# Altium PCB SAMV71_Xplained_Ultra.PcbDoc (part 8 of 9)
Units mm, origin at the board's own origin, x right, y up, seen from the top; angles counter-clockwise.
Board outline 90 x 135 mm, 8 copper layers (Top Layer LF-Signals, Ground Plane 1 (GND), Power Plane (VCC), Ground Plane 2 (GND), Signal Layer 1, Signal Layer 2, Ground Plane 3 (GND), Bottom Layer LF-Signals), stack 1.632 mm thick; 483 components, 411 nets, 1994 pads, 1021 vias.
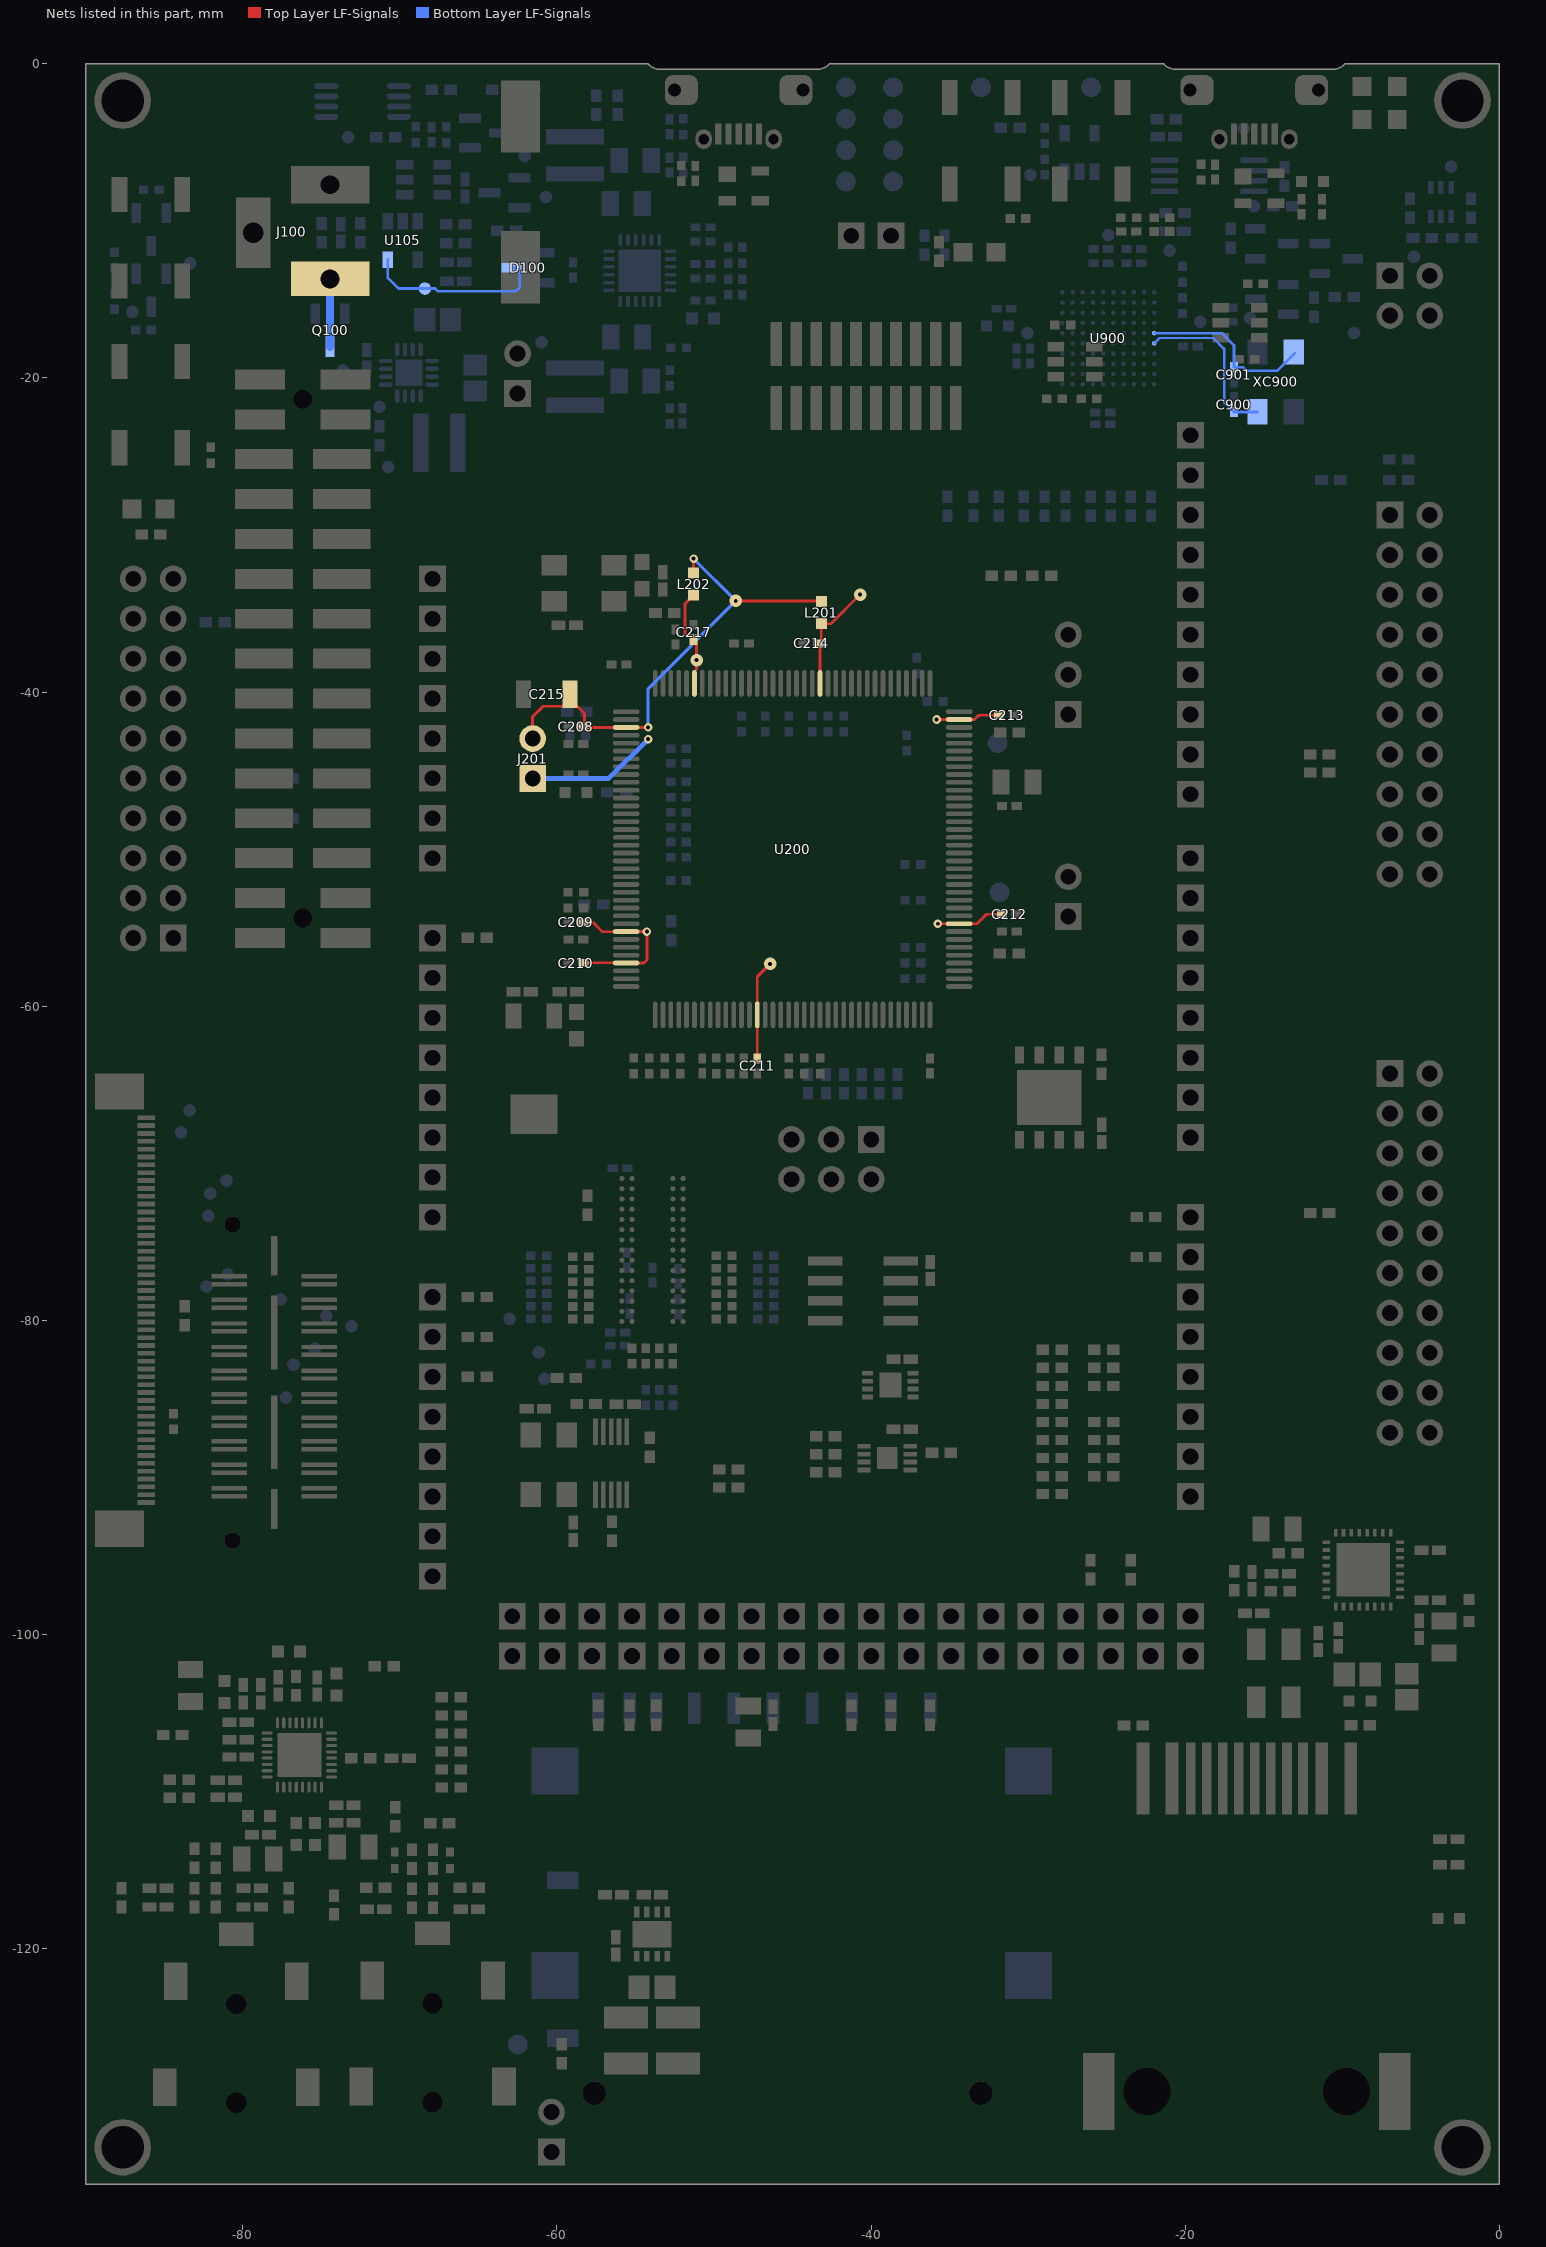
[diagram p13: the nets of this part, all layers, seen from the top]

## Via types
v1: diameter 0.55, hole 0.25, Top Layer LF-Signals to Bottom Layer LF-Signals, 546 vias
v2: diameter 0.55, hole 0.25, Top Layer LF-Signals to Bottom Layer LF-Signals, tented both sides, 190 vias
v3: diameter 0.55/0.55/0.55/0.8 (per signal layer), hole 0.25, Top Layer LF-Signals to Bottom Layer LF-Signals, tented top, 179 vias
v4: diameter 0.4, hole 0.2, Top Layer LF-Signals to Bottom Layer LF-Signals, 40 vias
v5: diameter 0.55, hole 0.25, Top Layer LF-Signals to Bottom Layer LF-Signals, tented top, 24 vias
v6: diameter 0.4, hole 0.2, Top Layer LF-Signals to Bottom Layer LF-Signals, tented both sides, 16 vias
v7: diameter 0.7, hole 0.35, Top Layer LF-Signals to Bottom Layer LF-Signals, 9 vias
v8: diameter 0.4/0.4/0.4/0.8 (per signal layer), hole 0.2, Top Layer LF-Signals to Bottom Layer LF-Signals, tented top, 6 vias
v9: diameter 0.4, hole 0.2, Top Layer LF-Signals to Bottom Layer LF-Signals, tented top, 5 vias
v10: diameter 0.66, hole 0.33, Top Layer LF-Signals to Bottom Layer LF-Signals, tented top, 4 vias
v11: diameter 0.55/0.55/0.55/0.8 (per signal layer), hole 0.25, Top Layer LF-Signals to Bottom Layer LF-Signals, 2 vias

## Nets (pads, with @x,y where several pads share a name; then routed paths per layer and width w, separated by ;. In a path a pad name is that pad's centre, name@x,y a point inside that pad or via, vN(x,y) a via of type N, cw(c..) or ccw(c..) an arc to the next point about the centre after c; other vN are vias at no path point) (continued)
VDDCORE: C209.1 C210.1 C211.1 C212.1 C213.1 J201.1@-61.55,-45.5 U200.29 U200.33 U200.50 U200.81 U200.107 | length 33.1
  Top Layer LF-Signals w0.175: U200.107@-34.4,-41.75 -33.425,-41.75 -33.15,-41.475 C213.1@-31.85,-41.475
  Top Layer LF-Signals w0.18: C210.1@-58.25,-57.25 -58.25,-57.238 -55.612,-57.238 U200.33@-55.6,-57.25 -54.475,-57.25 -54.275,-57.05 v1(-54.275,-55.25) U200.29@-55.6,-55.25 -55.6,-55.265 -57.107,-55.265 -57.137,-55.235 -57.14,-55.235 -57.725,-54.65 C209.1@-58.25,-54.65 ; C211.1@-47.25,-63.25 U200.50@-47.25,-60.55 -47.25,-58.125 v3(-46.425,-57.3) ; v1(-35.825,-41.75) U200.107@-34.4,-41.75 ; v1(-35.75,-54.75) -33.25,-54.75 -32.65,-54.15 C212.1@-31.75,-54.15
  Bottom Layer LF-Signals w0.3: J201.1@-61.55,-45.5 -56.7,-45.5 v1(-54.2,-43)
VDDOUT: C208.1 C215.1 J201.2@-61.55,-42.96 L201.1 L202.1 U200.3 | length 31.8
  Top Layer LF-Signals w0.175: C208.1@-58.25,-42.2 -58.187,-42.263 -55.6,-42.263 U200.3@-55.6,-42.25 v1(-54.2,-42.25)
  Top Layer LF-Signals w0.18: J201.2@-61.55,-42.96 -61.55,-41.575 -60.875,-40.9 -59.3,-40.9 -59.175,-40.775 C215.1@-59.175,-40.125 -59.175,-40.45 -58.25,-41.375 C208.1@-58.25,-42.2
  Top Layer LF-Signals w0.2: L202.1@-51.3,-32.426 v1(-51.3,-31.508) ; v3(-48.618,-34.197) -43.228,-34.197 L201.1@-43.175,-34.25
  Bottom Layer LF-Signals w0.2: v1(-54.2,-42.25) -54.2,-39.779 v3(-48.618,-34.197) v1@-51.306,-31.508
VDDPLL: C214.1 L201.2 U200.123 | length 7.1
  Top Layer LF-Signals w0.175: C214.1@-43.275,-36.9 -43.175,-36.8 L201.2@-43.175,-35.65 -42.55,-35.65 v3(-40.7,-33.8) ; U200.123@-43.25,-39.45 C214.1@-43.25,-36.9
VDDUTMIC: C217.1 L202.2 U200.139 | length 6.4
  Top Layer LF-Signals w0.175: L202.2@-51.3,-33.826 -51.853,-34.379 -51.853,-36.297 -51.75,-36.4 -51.465,-36.4 -51.3,-36.565 -51.3,-36.75 -51.111,-36.939 v3(-51.111,-37.966) -51.111,-38.563 -51.25,-38.702 U200.139@-51.25,-39.45
VIN: J100.3 Q100.3 | length 4.6
  Bottom Layer LF-Signals w0.5: Q100.3@-74.45,-18.025 J100.3@-74.45,-13.7 J100.3@-74.25,-13.5
VMAX: D100.3 pad.1@-68.411,-14.313 U105.5 | length 11.7
  Bottom Layer LF-Signals w0.175: U105.5@-70.771,-12.463 -70.771,-13.64 -70.098,-14.313 pad.1@-68.411,-14.313 -67.755,-14.313 -67.579,-14.489 -62.631,-14.489 -62.373,-14.231
  Bottom Layer LF-Signals w0.18: D100.3@-62.898,-12.981 -62.51,-12.981 -62.373,-13.118 -62.373,-14.231
XIN0: C900.1 U900.A5 XC900.1 | length 10.6
  Bottom Layer LF-Signals w0.15: U900.A5@-21.975,-17.8 -21.637,-17.462 -18.213,-17.462 -17.525,-18.15
  Bottom Layer LF-Signals w0.175: -17.525,-18.15 -17.525,-21.55 C900.1@-16.9,-22.175 XC900.1@-15.425,-22.175
XOUT0: C901.1 U900.A6 XC900.3 | length 11.2
  Bottom Layer LF-Signals w0.175: U900.A6@-21.975,-17.15 -17.675,-17.15 -16.9,-17.925 C901.1@-16.9,-19.325 -16.325,-19.325 -16.1,-19.55 -14.15,-19.55 XC900.3@-13.025,-18.425
pads on no net: D101.2 J101.1@-6.97,-13.49 J101.2@-4.43,-13.49 J101.3@-6.97,-16.03 J101.4@-4.43,-16.03 J103.1@-62.51,-20.987 J103.2@-62.51,-18.447 J200.1@-27.442,-54.295 J200.2@-27.442,-51.755 J201.1@-61.55,-45.5 J201.2@-61.55,-42.96 J202.1@-27.442,-41.43 J202.2@-27.442,-38.89 J202.3@-27.442,-36.35 J302.6@-44.834,-1.675 J302.7@-52.034,-1.675 J302.8@-46.209,-4.8 J302.9@-50.659,-4.8 J400.0 J400.1@-76.185,-21.364 J401.1@-6.97,-28.73 J401.2@-4.43,-28.73 J401.3@-6.97,-31.27 J401.4@-4.43,-31.27 J401.5@-6.97,-33.81 J401.6@-4.43,-33.81 J401.7@-6.97,-36.35 J401.8@-4.43,-36.35 J401.9@-6.97,-38.89 J401.10@-4.43,-38.89 J401.11@-6.97,-41.43 J401.12@-4.43,-41.43 J401.13@-6.97,-43.97 J401.14@-4.43,-43.97 J401.15@-6.97,-46.51 J401.16@-4.43,-46.51 J401.17@-6.97,-49.05 J401.18@-4.43,-49.05 J401.19@-6.97,-51.59 J401.20@-4.43,-51.59 J402.1@-6.97,-64.29 J402.2@-4.43,-64.29 J402.3@-6.97,-66.83 J402.4@-4.43,-66.83 J402.5@-6.97,-69.37 J402.6@-4.43,-69.37 J402.7@-6.97,-71.91 J402.8@-4.43,-71.91 J402.9@-6.97,-74.45 J402.10@-4.43,-74.45 J402.11@-6.97,-76.99 J402.12@-4.43,-76.99 J402.13@-6.97,-79.53 J402.14@-4.43,-79.53 J402.15@-6.97,-82.07 J402.16@-4.43,-82.07 J402.17@-6.97,-84.61 J402.18@-4.43,-84.61 J402.19@-6.97,-87.15 J402.20@-4.43,-87.15 J403.7 J403.8 J403.11 J403.13 J404.23 J404.24 J404.25 J404.26 J404.28 J404.29 J404.30 J404.31 J404.37 J404.38 J404.39 J404.40 J405.0 J405.1 J405.3 J405.4 J405.5 J405.7 J405.8 J405.9 J405.11 J405.12 J405.13 J405.14 J405.15 J405.17 J405.18 J405.19 J405.20 J405.21 J405.22 J405.23 J405.24 J405.26 J405.28 J405.29 J405.30 J405.31 J405.32 J405.36 J406.1@-84.44,-55.654 J406.2@-86.98,-55.654 J406.3 J406.4@-86.98,-53.114 J406.5 J406.6@-86.98,-50.574 J406.7@-84.44,-48.034 J406.8@-86.98,-48.034 J406.9@-84.44,-45.494 J406.10@-86.98,-45.494 J406.11 J406.12@-86.98,-42.954 J406.13@-84.44,-40.414 J406.14@-86.98,-40.414 J406.15@-84.44,-37.874 J406.16@-86.98,-37.874 J406.17 J406.18@-86.98,-35.334 J406.19 J406.20@-86.98,-32.794 J500.1@-19.67,-46.51 J500.2@-19.67,-43.97 J500.3@-19.67,-41.43 J500.4@-19.67,-38.89 J500.5@-19.67,-36.35 J500.6@-19.67,-33.81 J500.7@-19.67,-31.27 J500.8@-19.67,-28.73 J500.9@-19.67,-26.19 J500.10@-19.67,-23.65 J501.1@-67.93,-32.794 J501.2@-67.93,-35.334 J501.3@-67.93,-37.874 J501.4@-67.93,-40.414 J501.5@-67.93,-42.954 J501.6@-67.93,-45.494 J501.7@-67.93,-48.034 J501.8@-67.93,-50.574 J502.1@-67.93,-55.654 J502.2@-67.93,-58.194 J502.3@-67.93,-60.734 J502.4@-67.93,-63.274 J502.5@-67.93,-65.814 J502.6@-67.93,-68.354 J502.7@-67.93,-70.894 J502.8@-67.93,-73.434 J503.1@-19.67,-68.354 J503.2@-19.67,-65.814 J503.3@-19.67,-63.274 J503.4@-19.67,-60.734 J503.5@-19.67,-58.194 J503.6@-19.67,-55.654 J503.7@-19.67,-53.114 J503.8@-19.67,-50.574 J504.1@-67.93,-78.514 J504.2@-67.93,-81.054 J504.3@-67.93,-83.594 J504.4@-67.93,-86.134 J504.5@-67.93,-88.674 J504.6@-67.93,-91.214 J504.7@-67.93,-93.754 J504.8@-67.93,-96.294 J505.1@-19.67,-91.214 J505.2@-19.67,-88.674 J505.3@-19.67,-86.134 J505.4@-19.67,-83.594 J505.5@-19.67,-81.054 J505.6@-19.67,-78.514 J505.7@-19.67,-75.974 J505.8@-19.67,-73.434 J506.1@-39.99,-68.481 J506.2@-39.99,-71.021 J506.3@-42.53,-68.481 J506.4@-42.53,-71.021 J506.5@-45.07,-68.481 J506.6@-45.07,-71.021 J507.0 J600.0 J700.0 J700.9 J800.0 J800.4 J800.5 J801.0 J801.4 J801.5 J900.4 J900.6@-12,-1.675 J900.7@-19.2,-1.675 J900.8@-13.375,-4.8 J900.9@-17.825,-4.8 J1000.1@-60.35,-132.945 J1000.2@-60.35,-130.405 U100.5 U101.5 U101.6 U101.7 U104.0 U106.3 U600.0 U600.9 U601.G2 U601.G6 U601.H1 U601.H2 U601.H7 U601.J1 U601.K1 U601.L2 U601.L6 U601.M6 U601.M7 U602.1 U602.2 U602.3 U602.7 U603.1 U603.2 U603.3 U603.7 U800.24 U800.26 U801.4 U900.A2 U900.A4 U900.A7 U900.B1 U900.B3 U900.B7 U900.C1 U900.C2 U900.C4 U900.C6 U900.D1 U900.D2 U900.D4 U900.D5 U900.D7 U900.E1 U900.E3 U900.E4 U900.E7 U900.E8 U900.F3 U900.F4 U900.G1 U900.G2 U900.G3 U900.G4 U900.G6 U900.G8 U900.G9 U900.G10 U900.H1 U900.H4 U900.H5 U900.H6 U900.H10 U900.J1 U900.J2 U900.J3 U900.J7 U900.J10 U900.K1 U900.K5 U900.K7

## Polygon pours and split planes (outlines as drawn)
GND on Top Layer LF-Signals "Top Layer GND Fill" (solid, remove dead copper, pour order 26): 0,0 -90,0 -90,-135 0,-135
RJ45_GND on Top Layer LF-Signals "Ethernet GND" (solid, pour order 17): -27.075,-106.425 -3.35,-106.425 -3.35,-134.375 -27.075,-134.375
AUDIO_GND on Top Layer LF-Signals "Audio GND" (solid, remove dead copper, pour order 16): -90,-98.175 -62.2,-98.175 -62.2,-134.925 -62.225,-134.95 -89.95,-134.95 -90,-135
GND on Bottom Layer LF-Signals "Bottom Layer GND Fill" (solid, remove dead copper, pour order 32): 0,0 -90,0 -90,-135 0,-135
VCC_P3V3 on Bottom Layer LF-Signals "VCC_Fill" (solid, remove dead copper, pour order 14): -58.307,-4.63 -58.307,-2.805 -58.207,-2.705 -55.407,-2.705 -55.357,-2.755 -55.357,-4.555 -55.432,-4.63
PAD on Bottom Layer LF-Signals "Top Layer LF-signals-No Net" (solid, remove dead copper, pour order 13): -30.7,-64.05 -26.6,-64.05 -26.6,-67.55 -30.7,-67.55
GND on Bottom Layer LF-Signals "REG 5V0 GND" (solid, pour order 18): -67.4,-14.925 -64.05,-14.925 -64.05,-19.825 -66.1,-19.825 -66.1,-20.75 -68.425,-20.75 -68.425,-19.675 -67.4,-19.675 -67.4,-17.425
NetL100_1 on Bottom Layer LF-Signals "REF 5V0 SW" (solid, pour order 19): -69.925,-21.658 -69.925,-26.35 -67.775,-26.35 -67.775,-21.658
VCC_IN_P5V0 on Bottom Layer LF-Signals "REF 5V0 OUT" (solid, pour order 22): -64.05,-20.125 -64.05,-26.35 -67.375,-26.35 -67.375,-21.65 -66.7,-20.975 -66.15,-20.975 -65.95,-20.975 -65.95,-20.125
VCC_EXT_P5V0_P14V0 on Bottom Layer LF-Signals "REG 5V0 IN" (solid, pour order 24): -68.43,-17.675 -68.429,-17.675 -67.65,-17.675 -67.65,-14.925 -73.825,-14.925 -73.825,-17.675
no net on Top Overlay "MountingHole_Index" (solid): -4.5,-0.3 -0.3,-0.3 -0.3,-4.5 -4.5,-4.5
GND on Ground Plane 1 (GND) (split plane): -67.577,-21.573 -71.323,-21.573 -71.323,-17.627 -67.577,-17.627
GND on Ground Plane 1 (GND) (split plane): -0.51,-134.49 -89.49,-134.49 -89.49,-0.51 -54.412,-0.51 -54.398,-0.523 -54.256,-0.623 -54.105,-0.707 -53.944,-0.774 -53.778,-0.822 -53.607,-0.851 -53.434,-0.86 -43.434,-0.86 -43.261,-0.851 -43.09,-0.822 -42.924,-0.774 -42.763,-0.707 -42.612,-0.623 -42.47,-0.523 -42.456,-0.51 -21.578,-0.51 -21.564,-0.523 -21.422,-0.623 -21.271,-0.707 -21.11,-0.774 -20.944,-0.822 -20.773,-0.851 -20.6,-0.86 -10.6,-0.86 -10.427,-0.851 -10.256,-0.822 -10.09,-0.774 -9.929,-0.707 -9.778,-0.623 -9.636,-0.523 -9.622,-0.51 -0.51,-0.51
VCC_EDBG_P3V3 on Power Plane (VCC) (split plane): -0.51,-14.57 -0.709,-14.371 -0.741,-14.347 -0.777,-14.332 -0.816,-14.327 -5.842,-14.327 -5.881,-14.332 -5.918,-14.347 -5.949,-14.371 -5.973,-14.402 -5.988,-14.439 -5.993,-14.478 -5.993,-16.958 -5.988,-16.997 -5.973,-17.034 -5.949,-17.065 -4.651,-18.363 -4.651,-27.349 -33.937,-27.349 -35.599,-25.687 -35.599,-8.35 -35.604,-8.311 -35.619,-8.274 -35.643,-8.243 -38.024,-5.862 -38.055,-5.838 -38.07,-5.832 -38.092,-5.823 -38.131,-5.818 -56.686,-5.818 -56.686,-0.51 -54.412,-0.51 -54.398,-0.523 -54.256,-0.623 -54.105,-0.707 -53.944,-0.774 -53.778,-0.822 -53.607,-0.851 -53.434,-0.86 -43.434,-0.86 -43.261,-0.851 -43.09,-0.822 -42.924,-0.774 -42.763,-0.707 -42.612,-0.623 -42.47,-0.523 -42.456,-0.51 -21.578,-0.51 -21.564,-0.523 -21.422,-0.623 -21.271,-0.707 -21.11,-0.774 -20.944,-0.822 -20.773,-0.851 -20.6,-0.86 -10.6,-0.86 -10.427,-0.851 -10.256,-0.822 -10.09,-0.774 -9.929,-0.707 -9.778,-0.623 -9.636,-0.523 -9.622,-0.51 -0.51,-0.51
VDDCORE on Power Plane (VCC) (split plane): -35.151,-59.849 -54.849,-59.849 -54.849,-40.151 -35.151,-40.151
VCC_MCU_P3V3 on Power Plane (VCC) (split plane): -37.451,-10.213 -37.451,-29.6 -37.446,-29.639 -37.437,-29.661 -37.431,-29.676 -37.407,-29.707 -36.357,-30.757 -30.926,-36.188 -30.926,-60.925 -35.025,-65.024 -53.812,-65.024 -61.849,-56.987 -61.849,-40.738 -45.143,-24.032 -45.119,-24.001 -45.115,-23.99 -45.104,-23.964 -45.099,-23.925 -45.099,-10.613 -42.862,-8.376 -39.288,-8.376
VCC_P5V0 on Power Plane (VCC) (split plane): -51.676,-15.787 -58.563,-22.674 -62.837,-22.674 -64.238,-21.273 -64.238,-9.334 -61.03,-6.126 -56.837,-6.126 -56.798,-6.121 -56.796,-6.12 -51.676,-6.12
VCC_TARGET_P3V3 on Power Plane (VCC) (split plane): -56.989,-5.818 -58.42,-5.818 -58.459,-5.823 -58.461,-5.824 -61.093,-5.824 -61.132,-5.829 -61.169,-5.844 -61.2,-5.868 -64.496,-9.164 -64.52,-9.195 -64.535,-9.232 -64.54,-9.271 -64.54,-21.336 -64.535,-21.375 -64.52,-21.412 -64.496,-21.443 -63.007,-22.932 -62.976,-22.956 -62.939,-22.971 -62.9,-22.976 -58.5,-22.976 -58.461,-22.971 -58.424,-22.956 -58.393,-22.932 -51.418,-15.957 -51.394,-15.926 -51.379,-15.889 -51.374,-15.85 -51.374,-6.12 -38.194,-6.12 -35.901,-8.413 -35.901,-25.75 -35.896,-25.789 -35.887,-25.811 -35.881,-25.826 -35.857,-25.857 -34.107,-27.607 -34.076,-27.631 -34.039,-27.646 -34,-27.651 -4.5,-27.651 -4.461,-27.646 -4.424,-27.631 -4.393,-27.607 -4.369,-27.576 -4.354,-27.539 -4.349,-27.5 -4.349,-18.3 -4.354,-18.261 -4.369,-18.224 -4.393,-18.193 -5.691,-16.895 -5.691,-14.629 -0.879,-14.629 -0.51,-14.998 -0.51,-134.49 -89.49,-134.49 -89.49,-0.51 -56.989,-0.51
VCC_P1V2 on Ground Plane 2 (GND) (split plane): -38.376,-20.563 -38.376,-53.975 -38.371,-54.014 -38.362,-54.036 -38.356,-54.051 -38.332,-54.082 -2.076,-90.338 -2.076,-101.562 -4.413,-103.899 -14.262,-103.899 -16.149,-102.012 -16.149,-85.375 -16.154,-85.336 -16.169,-85.299 -16.193,-85.268 -53.199,-48.262 -53.199,-46.007 -53.194,-46.001 -53.179,-45.964 -53.174,-45.925 -53.174,-13.326 -45.613,-13.326
VCC_EXT_P5V0_P14V0 on Ground Plane 2 (GND) (split plane): -71.226,-18.25 -71.226,-19.837 -79.007,-27.618 -79.031,-27.649 -79.046,-27.686 -79.051,-27.725 -79.051,-78.674 -83.737,-78.674 -84.199,-78.212 -84.199,-74.863 -83.337,-74.001 -83.313,-73.97 -83.298,-73.933 -83.293,-73.894 -83.293,-19.026 -75.4,-19.026 -75.361,-19.021 -75.324,-19.006 -75.293,-18.982 -75.282,-18.968 -75.268,-18.957 -72.737,-16.426 -71.226,-16.426
VCC_P5V0 on Ground Plane 2 (GND) (split plane): -53.501,-48.325 -53.496,-48.364 -53.487,-48.386 -53.481,-48.401 -53.457,-48.432 -16.451,-85.438 -16.451,-102.012 -18.188,-103.749 -36.25,-103.749 -36.289,-103.754 -36.326,-103.769 -36.357,-103.793 -49.763,-117.199 -66.162,-117.199 -69.774,-113.587 -69.774,-56.65 -69.774,-23.088 -60.012,-13.326 -53.501,-13.326
VCC_P5V0 on Ground Plane 2 (GND) (split plane): -5.515,-15.117 -5.515,-16.975 -6.039,-17.499 -11.987,-17.499 -21.193,-8.293 -21.224,-8.269 -21.239,-8.263 -21.261,-8.254 -21.3,-8.249 -43.219,-8.249 -43.259,-8.254 -43.284,-8.265 -43.295,-8.269 -43.326,-8.293 -45.614,-10.581 -67.257,-10.581 -67.296,-10.586 -67.333,-10.601 -67.364,-10.625 -71.12,-14.381 -71.151,-14.394 -71.182,-14.418 -71.206,-14.449 -71.221,-14.486 -71.226,-14.525 -71.226,-16.124 -72.8,-16.124 -72.839,-16.129 -72.876,-16.144 -72.907,-16.168 -75.463,-18.724 -85.173,-18.724 -85.674,-18.223 -85.674,-16.163 -84.987,-15.476 -78.725,-15.476 -78.686,-15.471 -78.664,-15.462 -78.649,-15.456 -78.618,-15.432 -66.887,-3.701 -16.93,-3.701
VCC_P1V8 on Ground Plane 2 (GND) (split plane): -45.726,-11.675 -45.726,-13.024 -53.325,-13.024 -53.338,-13.025 -53.35,-13.024 -60.075,-13.024 -60.114,-13.029 -60.151,-13.044 -60.182,-13.068 -70.032,-22.918 -70.056,-22.949 -70.071,-22.986 -70.076,-23.025 -70.076,-56.65 -70.076,-62.275 -70.076,-113.587 -73.513,-117.024 -81.437,-117.024 -84.349,-114.112 -84.349,-100.638 -78.793,-95.082 -78.769,-95.051 -78.754,-95.014 -78.749,-94.975 -78.749,-27.788 -70.968,-20.007 -70.944,-19.976 -70.929,-19.939 -70.924,-19.9 -70.924,-14.613 -67.194,-10.883 -45.726,-10.883
GND on Ground Plane 2 (GND) (split plane): -0.51,-134.49 -89.49,-134.49 -89.49,-0.51 -54.412,-0.51 -54.398,-0.523 -54.256,-0.623 -54.105,-0.707 -53.944,-0.774 -53.778,-0.822 -53.607,-0.851 -53.434,-0.86 -43.434,-0.86 -43.261,-0.851 -43.09,-0.822 -42.924,-0.774 -42.763,-0.707 -42.612,-0.623 -42.47,-0.523 -42.456,-0.51 -21.578,-0.51 -21.564,-0.523 -21.422,-0.623 -21.271,-0.707 -21.11,-0.774 -20.944,-0.822 -20.773,-0.851 -20.6,-0.86 -10.6,-0.86 -10.427,-0.851 -10.256,-0.822 -10.09,-0.774 -9.929,-0.707 -9.778,-0.623 -9.636,-0.523 -9.622,-0.51 -0.51,-0.51
GND on Ground Plane 3 (GND) (split plane): -67.577,-21.573 -71.323,-21.573 -71.323,-17.627 -67.577,-17.627
GND on Ground Plane 3 (GND) (split plane): -0.51,-134.49 -89.49,-134.49 -89.49,-0.51 -54.412,-0.51 -54.398,-0.523 -54.256,-0.623 -54.105,-0.707 -53.944,-0.774 -53.778,-0.822 -53.607,-0.851 -53.434,-0.86 -43.434,-0.86 -43.261,-0.851 -43.09,-0.822 -42.924,-0.774 -42.763,-0.707 -42.612,-0.623 -42.47,-0.523 -42.456,-0.51 -21.578,-0.51 -21.564,-0.523 -21.422,-0.623 -21.271,-0.707 -21.11,-0.774 -20.944,-0.822 -20.773,-0.851 -20.6,-0.86 -10.6,-0.86 -10.427,-0.851 -10.256,-0.822 -10.09,-0.774 -9.929,-0.707 -9.778,-0.623 -9.636,-0.523 -9.622,-0.51 -0.51,-0.51

## Keep-outs
Keep-Out Layer:
  lines w0.1: -59.7,-0.3 -54.209,-0.3 ; -43.434,-0.649 ccw(c-43.434,0.386) -42.658,-0.3 ; -20.599,-0.649 cw(c-20.599,0.386) -21.375,-0.3 ; -10.6,-0.649 ccw(c-10.6,0.386) -9.824,-0.3 ; -54.209,-0.3 ccw(c-53.433,0.386) -53.433,-0.649 cw(c-53.433,0.386) -54.209,-0.3 ; -42.658,-0.3 -54.259,-0.3 -89.7,-0.3 -89.7,-134.7 -0.3,-134.7 -0.3,-0.3 -9.825,-0.3 ; -42.658,-0.3 -21.375,-0.3 ; -21.375,-0.3 -9.824,-0.3

## Other copper
Top Layer LF-Signals:
  pour cut-out: -3.575,-117.73 -2.871,-117.73 -2.871,-118.423 -3.575,-118.423
  pour cut-out: -55.872,-70.425 -51.972,-70.425 -51.972,-80.625 -55.872,-80.625
  pour cut-out: -71.667,-22.128 -71.667,-14.796 -72.4,-14.796 -72.4,-22.116
  pour cut-out: -71.87,-14.796 -71.87,-14.8 -70.8,-14.8 -70.8,-14.275 -71.944,-14.275
  pour cut-out: -71.87,-22.1 -63.8,-22.1 -63.8,-22.634 -71.87,-22.634
Bottom Layer LF-Signals:
  rectangle net NetL100_1: -69.925,-21.9 -68.418,-21.658
  rectangle net VCC_EXT_P5V0_P14V0: -69.92,-17.675 -68.43,-17.473
  region net GND: -67.305,-20.75 -67.305,-19.921 -67.617,-19.921 -67.617,-20.75
  pour cut-out: -64.05,-25.981 -63.849,-25.981 -63.849,-14.615 -64.05,-14.615
  pour cut-out: -72.625,-17.675 -72.625,-20.292 -72.617,-20.3 -70.9,-20.3 -70.9,-20.55 -70.908,-20.558 -72.95,-20.558 -72.95,-17.67
  region net VCC_P5V0: -53.582,-14.805 -53.582,-15.48 -53.432,-15.63 -52.982,-15.63 -52.032,-16.58 -51.007,-16.58 -50.857,-16.43 -50.857,-14.78 -50.907,-14.73 -52.057,-14.73 -52.457,-14.33 -53.107,-14.33 -53.107,-14.63 -53.282,-14.805
  region net GND: -55.107,-11.58 -54.857,-11.58 -54.857,-10.605 -53.307,-9.055 -53.307,-3.955 -55.107,-3.955
  region net NetL102_1: -55.382,-11.58 -55.382,-7.48 -55.457,-7.405 -56.582,-7.405 -56.882,-7.105 -56.882,-6.33 -57.232,-5.98 -60.607,-5.98 -60.932,-6.305 -60.932,-7.63 -60.732,-7.83 -56.007,-7.83 -55.782,-8.055 -55.782,-10.58 -55.582,-10.78 -55.582,-11.58
  region net VCC_P3V3: -55.457,-7.155 -55.357,-7.055 -55.357,-4.005 -55.432,-3.93 -61.132,-3.93 -61.332,-4.13 -61.332,-5.38 -60.982,-5.73 -57.132,-5.73 -56.667,-6.195 -56.667,-6.945 -56.457,-7.155
  region net VCC_P5V0: -55.882,-11.555 -55.882,-10.805 -56.007,-10.68 -56.007,-8.155 -56.082,-8.08 -59.932,-8.08 -60.107,-8.255 -60.107,-9.655 -58.307,-11.455 -57.357,-11.455 -57.257,-11.555
  region net VCC_P5V0: -55.882,-14.93 -55.882,-15.48 -56.007,-15.605 -56.007,-18.205 -56.082,-18.28 -59.932,-18.28 -60.107,-18.105 -60.107,-16.705 -58.332,-14.93
  region net VCC_P2V0: -55.457,-19.205 -55.357,-19.305 -55.357,-22.355 -55.432,-22.43 -61.132,-22.43 -61.332,-22.23 -61.332,-20.98 -60.982,-20.63 -57.132,-20.63 -56.667,-20.165 -56.667,-19.415 -56.457,-19.205
  region net NetL101_1: -55.382,-14.78 -55.382,-18.88 -55.457,-18.955 -56.582,-18.955 -56.882,-19.255 -56.882,-20.03 -57.232,-20.38 -61.007,-20.38 -61.457,-19.93 -61.457,-18.93 -61.057,-18.53 -56.007,-18.53 -55.807,-18.33 -55.807,-15.755 -55.582,-15.53 -55.582,-14.78
  region net GND: -55.107,-14.78 -54.857,-14.78 -54.857,-15.805 -53.382,-17.28 -53.382,-22.405 -55.107,-22.405
  region net VCC_P5V0: -53.107,-12.03 -52.432,-12.03 -52.007,-11.605 -50.857,-11.605 -50.857,-10.055 -52.182,-10.055 -53.107,-10.98
  region net GND: -50.607,-16.83 -48.657,-16.83 -47.857,-16.03 -47.857,-15.355 -47.907,-15.305 -49.532,-15.305 -49.707,-15.13 -49.707,-14.13 -49.632,-14.055 -48.807,-14.055 -48.757,-14.005 -48.757,-12.33 -48.782,-12.305 -49.607,-12.305 -49.707,-12.205 -49.707,-11.055 -49.632,-10.98 -47.907,-10.98 -47.857,-10.93 -47.857,-10.105 -48.207,-9.755 -50.607,-9.755
Ground Plane 1 (GND) (plane layer: these items are gaps in the copper):
  lines w0.5: -71.575,-21.825 -67.325,-21.825 -67.325,-17.375 -71.575,-17.375 -71.575,-21.825
Power Plane (VCC) (plane layer: these items are gaps in the copper):
  lines w0.3: -58.42,-5.969 -38.131,-5.969 -35.75,-8.35 -35.75,-25.75 -34,-27.5 -4.5,-27.5 -4.5,-18.3 -5.842,-16.958 -5.842,-14.478 -0.816,-14.478 -0.252,-15.042 ; -57.658,0 -56.837,0 -56.837,-5.975 -61.093,-5.975 -64.389,-9.271 -64.389,-21.336 -62.9,-22.825 -58.5,-22.825 -51.525,-15.85 -51.525,-5.969 -45.339,-5.969 ; -62,-57.05 -62,-40.675 -45.25,-23.925 -45.25,-10.55 -42.925,-8.225 -39.225,-8.225 -37.3,-10.15 -37.3,-29.6 -36.25,-30.65 -30.775,-36.125 -30.775,-60.988 -34.962,-65.175 -53.875,-65.175 -62,-57.05 ; -55,-60 -35,-60 -35,-40 -55,-40 -55,-60
Ground Plane 2 (GND) (plane layer: these items are gaps in the copper):
  lines w0.3: -83.444,-18.875 -83.444,-73.894 -84.35,-74.8 -84.35,-78.275 -83.8,-78.825 -78.95,-78.825 ; -75.4,-18.875 -85.236,-18.875 -85.825,-18.286 -85.825,-16.1 -85.05,-15.325 -78.725,-15.325 -66.95,-3.55 -57.575,-3.55 -16.868,-3.55 -5.364,-15.054 -5.364,-17.038 -5.976,-17.65 -12.05,-17.65 -21.3,-8.4 -43.219,-8.4 -45.575,-10.756 -45.575,-11.675 ; -75.375,-18.85 -72.8,-16.275 -71.075,-16.275 ; -71.075,-18.25 -71.075,-19.9 ; -69.925,-62.275 -69.925,-23.025 -60.075,-13.175 -53.35,-13.175 -53.35,-48.325 -16.3,-85.375 -16.3,-102.075 ; -69.925,-56.65 -69.925,-113.65 ; -53.325,-45.925 -53.325,-13.175 -45.575,-13.175 ; -71.075,-19.9 -78.9,-27.725 -78.9,-94.975 -84.5,-100.575 -84.5,-114.175 -81.5,-117.175 -73.45,-117.175 -69.925,-113.65 ; -71.075,-19.9 -71.075,-14.525 -71.05,-14.525 -67.257,-10.732 -45.575,-10.732 -45.575,-13.15 -38.225,-20.5 -38.225,-53.975 -1.925,-90.275 -1.925,-101.625 -4.35,-104.05 -14.325,-104.05 -16.3,-102.075 ; -69.925,-113.65 -66.225,-117.35 -49.7,-117.35 -36.25,-103.9 -18.125,-103.9 -16.3,-102.075
Ground Plane 3 (GND) (plane layer: these items are gaps in the copper):
  lines w0.5: -71.575,-21.825 -67.325,-21.825 -67.325,-17.375 -71.575,-17.375 -71.575,-21.825

## Silkscreen, mask and mechanical layers (free items; w line width, h text height)
Top Overlay:
  circle w0.254: c-83.571,-2.35 r0.15
  pour cut-out: -4.26,-2.34 ccw(c-2.34,-2.34) -2.34,-4.26 ccw(c-2.34,-2.36) -0.44,-2.36 ccw(c-2.36,-2.36) -2.36,-0.44 ccw(c-2.36,-2.34)
  lines w0.254: -83.971,-4.5 -83.171,-4.5 ; -83.571,-4.5 -83.571,-3.9 ; -83.571,-2.35 -82.071,-2.35 ; -82.51,-3.411 cw(c-83.571,-2.35) -82.51,-1.289 ; -81.571,-2.35 -80.771,-2.35 ; -81.171,-2.75 -81.171,-1.95
  text "GND" at -89.05,-5.75 h1.52
  text "GND" at -85.014,-5.75 h1.52
  text "GND" at -3.75,-5.75 h1.52
  text "VCC_TARGET" at -38.3,-6.775 h1 r90
  text "VCC_MCU" at -40.925,-6.8 h1 r90
  text "DEBUG USB" at -21.4,-8.1 h1.5 r90
  text "TARGET USB" at -54.35,-9.2 h1.5 r90
  text "POWER" at -8.25,-10 h1.5 r90
  text "STATUS" at -6,-10.25 h1.5 r90
  text "SW0" at -36.2,-10.4 h1.5
  text "RESET" at -29.2,-10.4 h1.5
  text "EXT" at -7.866,-11.951 h0.67
  text "GND" at -5.326,-11.951 h0.67
  text "MCU CURRENT MEASURE" at -42.925,-12.15 h1 r90
  text "1" at -9.063,-13.913 h1.5
  text "LED0" at -34.525,-14.1 h1.5
  text "CORESIGHT20" at -44.601,-14.767 h1.5
  text "POWER" at -14.125,-15.225 h1.5
  text "PWR SWITCH" at -81.3,-15.263 h1.5 r90
  text "VIN - 5 to 14V" at -79.135,-16.375 h1.5
  text "3" at -9.063,-16.453 h1.5
  text "SUPER CAP" at -66.058,-16.7 h1.5
  text "CAMERA INTERFACE" at -80.925,-18.136 h1.5
  text "3V3" at -5.326,-18.264 h0.67
  text "5V0" at -7.866,-18.292 h0.67
  text "VBAT" at -60.412,-18.911 h1.5
  text "VCAP" at -60.412,-21.451 h1.5
  text "27" at -70.932,-23.093 h1.5
  text "SW1" at -81.425,-23.425 h1.5 r90
  text "SCL" at -17.8,-24.114 h1.5
  text "SWD + ETM" at -43.475,-25.938 h1.5
  text "EXT1" at -7.7,-26.1 h1.5
  text "SDA" at -17.8,-26.653 h1.5
  text "b" at -67.871,-27.67 h12
  text "AREF" at -17.801,-29.193 h1.5
  text "1" at -8.73,-29.238 h1.5
  text "12 MHz" at -61.226,-29.372 h1.5
  text "LED1" at -82.5,-29.875 h1.5 r90
  text "CRYSTAL" at -61.228,-30.614 h1.5
  text "21" at -70.932,-30.712 h1.5
  text "SAMV71" at -49.783,-30.836 h2
  text "X" at -41.43,-30.857 h4
  text "PLAINED" at -38.005,-30.857 h2
  text "ULTRA" at -29.082,-30.845 h1
  text "GND" at -17.801,-31.732 h1.5
  text "3" at -8.923,-31.778 h1.5
  text "VBAT" at -66.075,-33.258 h1.5
  text "D13" at -17.801,-34.271 h1.5
  text "5" at -8.925,-34.318 h1.5
  text "USB VBUS" at -30.751,-34.395 h1.5
  text "IOREF" at -66.075,-35.798 h1.5
  text "VBUS" at -25.476,-36.749 h1.5
  text "D12" at -17.801,-36.811 h1.5
  text "7" at -8.916,-36.858 h1.5
  text "SAMV71Q21" at -40,-36.95 h1.5
  text "RESET" at -66.075,-38.338 h1.5
  text "PC09" at -25.476,-39.289 h1.5
  text "D11" at -17.801,-39.35 h1.5
  text "9" at -8.936,-39.349 h1.5
  text "3V3" at -66.075,-40.878 h1.5
  text "LED1" at -25.476,-41.829 h1.5
  text "D10" at -17.801,-41.89 h1.5
  text "11" at -9.5,-41.889 h1.5
  text "11" at -70.932,-43.412 h1.5
  text "5V0" at -66.074,-43.418 h1.5
  text "D9" at -17.801,-44.43 h1.5
  text "13" at -9.673,-44.429 h1.5
  text "GND" at -66.075,-45.964 h1.5
  text "D8" at -17.801,-46.97 h1.5
  text "15" at -9.683,-46.969 h1.5
  text "J201" at -62.617,-48.338 h1.5
  text "GND" at -66.075,-48.498 h1.5
  text "17" at -9.7,-49.509 h1.5
  text "ERASE" at -29.725,-49.8 h1.5
  text "D7" at -17.801,-51.03 h1.5
  text "VIN" at -66.075,-51.038 h1.5
  text "SAMV71 DEBUG (SWD)" at -81.614,-51.489 h1.5 r90
  text "19" at -9.665,-52.049 h1.5
  text "PB12" at -25.476,-52.155 h1.5
  text "D6" at -17.801,-53.589 h1.5
  text "3V3" at -25.501,-54.83 h1.5
  text "1" at -70.932,-56.113 h1.5
  text "D5" at -17.801,-56.148 h1.5
  text "2" at -87.304,-58.289 h1.5
  text "1" at -84.667,-58.281 h1.5
  text "AD1" at -72.225,-58.658 h1.5
  text "D4" at -17.801,-58.708 h1.5
  text "AD2" at -72.406,-61.198 h1.5
  text "D3" at -17.801,-61.267 h1.5
  text "EXT2" at -6.978,-61.75 h1.5
  text "EXT4" at -89.081,-62.025 h1.5
  text "LCD" at -88.8,-63.4 h1.5
  text "AD3" at -72.397,-63.738 h1.5
  text "D2" at -17.801,-63.843 h1.5
  text "1" at -8.73,-64.749 h1.5
  text "32.768 kHz" at -59.153,-66.07 h1.5
  text "D1 (TXD)" at -17.801,-66.13 h1.5
  text "AD4" at -72.432,-66.278 h1.5
  text "RST" at -47.23,-66.85 h1.5
  text "SCK" at -43.911,-66.85 h1.5
  text "MISO" at -40.425,-66.85 h1.5
  text "3" at -8.923,-67.288 h1.5
  text "CRYSTAL" at -59.153,-67.312 h1.5
  text "D0 (RXD)" at -17.801,-68.69 h1.5
  text "AD5" at -72.407,-68.818 h1.5
  text "SDRAM" at -56.238,-69.75 h1.5
  text "5" at -8.925,-69.822 h1.5
  text "SPI" at -38.1,-70.225 h1.5
  text "QSPI FLASH" at -31.3,-70.675 h1.5
  text "AD6" at -72.409,-71.358 h1.5
  text "S25FL" at -31.3,-71.85 h1.5
  text "MEDIALB" at -80.901,-72.125 h1.5
  text "7" at -8.916,-72.361 h1.5
  text "GND" at -47.575,-73.55 h1.5
  text "MOSI" at -44.174,-73.55 h1.5
  text "5V0" at -40.424,-73.55 h1.5
  text "AD7" at -72.425,-73.898 h1.5
  text "D14" at -17.801,-73.896 h1.5
  text "9" at -8.936,-74.909 h1.5
  text "D15" at -17.801,-76.435 h1.5
  text "11" at -9.5,-77.449 h1.5
  text "AD8" at -72.4,-78.978 h1.5
  text "D16" at -17.801,-78.975 h1.5
  text "13" at -9.673,-79.989 h1.5
  text "AD9" at -72.39,-81.518 h1.5
  text "D17" at -17.801,-81.514 h1.5
  text "15" at -9.683,-82.529 h1.5
  text "AD10" at -73.165,-84.058 h1.5
  text "D18" at -17.801,-84.054 h1.5
  text "17" at -9.7,-85.069 h1.5
  text "AD11" at -72.995,-86.598 h1.5
  text "D19" at -17.801,-86.594 h1.5
  text "CRYPTO FOOTPRINT" at -34.05,-86.946 h1.5 r90
  text "19" at -9.665,-87.609 h1.5
  text "DAC0" at -73.287,-89.138 h1.5
  text "D20" at -17.801,-89.134 h1.5
  text "DAC1" at -73.117,-91.678 h1.5
  text "D21" at -17.801,-91.673 h1.5
  text "AT24MAC402" at -43.7,-91.95 h1.5
  text "KSZ8061RNB" at -11.69,-92.459 h1.5
  text "ETHERNET CONFIG" at -30.377,-92.683 h1.5 r90
  text "CS2100" at -54.95,-93.475 h1.5
  text "CAN" at -72.6,-93.65 h1.5
  text "RX" at -72.041,-94.775 h1.5
  text "CAN" at -72.6,-96.225 h1.5
  text "D52" at -59.85,-97.025 h1.5 r90
  text "D46" at -52.228,-97.025 h1.5 r90
  text "D44" at -49.688,-97.025 h1.5 r90
  text "D40" at -44.775,-97.025 h1.5 r90
  text "D26" at -26.823,-97.025 h1.5 r90
  text "D24" at -24.3,-97.025 h1.5 r90
  text "D22" at -21.751,-97.025 h1.5 r90
  text "5V0" at -19.206,-97.024 h1.5 r90
  text "TX" at -72.04,-97.35 h1.5
  text "D53" at -59.85,-105.5 h1.5 r90
  text "D47" at -51.6,-105.5 h1.5 r90
  text "D45" at -49.688,-105.5 h1.5 r90
  text "D39" at -42.1,-105.5 h1.5 r90
  text "D27" at -26.823,-105.5 h1.5 r90
  text "D23" at -20.95,-105.5 h1.5 r90
  text "WM8904" at -73.8,-105.7 h1.5
  text "ATA6561" at -57.35,-115.425 h1.52
  text "HEADPHONE" at -86.475,-128.475 h1.52 r90
  text "MICROPHONE" at -61.275,-128.65 h1.52 r90
  text "GND" at -89.1,-130.6 h1.52
  text "GND" at -3.8,-130.6 h1.52
  text "CAN_L" at -58.375,-131.546 h1.5
  text "CAN_H" at -58.375,-133.336 h1.5
Bottom Overlay:
  lines w0.1: -16.35,-22.85 -16.35,-22.95 -16.05,-23.25 -15.95,-23.25
  lines w0.15: -88.917,-50.574 -88.447,-50.574 ; -88.917,-48.034 -88.447,-48.034 ; -88.917,-45.494 -88.447,-45.494 ; -88.917,-42.954 -88.447,-42.954 ; -88.917,-40.414 -88.447,-40.414 ; -88.917,-37.874 -88.447,-37.874 ; -88.917,-35.334 -88.447,-35.334 ; -88.917,-32.794 -88.447,-32.794 ; -88.447,-53.114 -88.917,-53.114 -88.917,-31.188 -88.267,-31.188
  text "BOOT" at -34.05,-1.964 h1.5
  text "GND" at -43.225,-2.425 h1 r270
  text "TCK" at -42.6,-3.964 h1.5
  text "RST" at -34.827,-3.964 h1.5
  text "TDI" at -42.6,-5.964 h1.5
  text "TDO" at -34.6,-5.964 h1.5
  text "TMS" at -42.6,-7.964 h1.5
  text "VCC" at -34.621,-7.964 h1.5
  text "EXT" at -6.4,-12.2 h0.67
  text "GND" at -0.9,-13.8 h0.67
  text "5V0" at -8.2,-16.35 h0.67
  text "3V3" at -0.9,-16.35 h0.67
  text "PA04" at -15.325,-24.225 h0.67
  text "PA03" at -15.319,-26.526 h0.67
  text "ADVREF" at -13.975,-29.066 h0.67
  text "ID" at -8.242,-29.066 h0.67
  text "GND" at -0.775,-29.066 h0.67
  text "GND" at -86.083,-31.5 h0.67
  text "GND" at -15.99,-31.606 h0.67
  text "PC31" at -8.242,-31.606 h0.67
  text "PA19" at -0.775,-31.606 h0.67
  text "VBAT" at -69.803,-33.13 h0.67
  text "NC" at -16.662,-34.146 h0.67
  text "PB03" at -8.242,-34.146 h0.67
  text "PB02" at -0.775,-34.146 h0.67
  text "3V3" at -69.803,-35.67 h0.67
  text "PD20" at -15.319,-36.686 h0.67
  text "PA00" at -8.242,-36.686 h0.67
  text "PC30" at -0.775,-36.686 h0.67
  text "RESET" at -79.238,-38.228 h0.67
  text "RESET" at -69.803,-38.21 h0.67
  text "PD21" at -15.542,-39.226 h0.67
  text "PD28" at -8.242,-39.226 h0.67
  text "PA05" at -0.775,-39.226 h0.67
  text "SWO" at -80.582,-40.706 h0.67
  text "3V3" at -69.803,-40.75 h0.67
  text "PD25" at -15.319,-41.766 h0.67
  text "PA03" at -8.242,-41.766 h0.67
  text "PA04" at -0.775,-41.766 h0.67
  text "5V0" at -69.803,-43.29 h0.67
  text "PC09" at -15.319,-44.306 h0.67
  text "PB00" at -8.242,-44.306 h0.67
  text "PB01" at -0.775,-44.306 h0.67
  text "SWCLK" at -79.238,-45.83 h0.67
  text "GND" at -69.803,-45.83 h0.67
  text "PA05" at -15.319,-46.846 h0.67
  text "PD25" at -8.242,-46.846 h0.67
  text "PD21" at -0.775,-46.846 h0.67
  text "SWDIO" at -79.35,-48.37 h0.67
  text "GND" at -69.803,-48.37 h0.67
  text "PD20" at -8.242,-49.386 h0.67
  text "PD22" at -0.775,-49.386 h0.67
  text "GND" at -80.785,-50.91 h0.67
  text "VIN" at -69.803,-50.91 h0.67
  text "PA02" at -15.319,-50.91 h0.67
  text "GND" at -8.242,-51.926 h0.67
  text "VCC" at -0.775,-51.926 h0.67
  text "PC19" at -15.431,-53.45 h0.67
  text "3V3" at -80.785,-55.99 h0.67
  text "PD26" at -69.803,-55.99 h0.67
  text "PD11" at -15.654,-55.99 h0.67
  text "3V3" at -86.075,-58.125 h0.67
  text "PC31" at -69.803,-58.53 h0.67
  text "PD27" at -15.319,-58.53 h0.67
  text "PA19" at -69.803,-61.07 h0.67
  text "PA06" at -15.319,-61.07 h0.67
  text "PD30" at -69.803,-63.61 h0.67
  text "PA00" at -15.319,-63.61 h0.67
  text "XPLAINED PRO" at -25.893,-64.646 h0.67
  text "ID" at -8.242,-64.626 h0.67
  text "GND" at -0.775,-64.626 h0.67
  text "EXTENSION HEADER" at -24.549,-65.796 h0.67
  text "PC13" at -69.803,-66.15 h0.67
  text "PD30" at -15.319,-66.15 h0.67
  text "PD30" at -8.242,-67.166 h0.67
  text "PC13" at -0.775,-67.166 h0.67
  text "PE00" at -69.803,-68.69 h0.67
  text "PD28" at -15.431,-68.69 h0.67
  text "ID" at -29.8,-69.35 h1.3
  text "GND" at -22.675,-69.35 h1.3
  text "PA06" at -8.242,-69.706 h0.67
  text "PD11" at -0.775,-69.706 h0.67
  text "PE03" at -69.803,-71.23 h0.67
  text "ADC+" at -29.8,-71.475 h1.3
  text "ADC-" at -22.675,-71.475 h1.3
  text "PC19" at -8.242,-72.246 h0.67
  text "PD26" at -0.775,-72.246 h0.67
  text "GPIO0" at -29.8,-73.6 h1.3
  text "GPIO1" at -22.675,-73.6 h1.3
  text "PE04" at -69.803,-73.77 h0.67
  text "PB01" at -15.542,-73.77 h0.67
  text "PA02" at -8.242,-74.786 h0.67
  text "PA24" at -0.775,-74.786 h0.67
  text "PWM+" at -29.8,-75.725 h1.3
  text "PWM-" at -22.675,-75.725 h1.3
  text "PB00" at -15.319,-76.31 h0.67
  text "PA03" at -8.242,-77.326 h0.67
  text "PA04" at -0.775,-77.326 h0.67
  text "IRQ" at -29.8,-77.85 h1.3
  text "SPI_SS_B" at -22.675,-77.85 h1.3
  text "PD24" at -69.803,-78.85 h0.67
  text "PD16" at -15.431,-78.85 h0.67
  text "PA21" at -8.242,-79.866 h0.67
  text "PB04" at -0.775,-79.866 h0.67
  text "TWI_SDA" at -29.8,-79.975 h1.3
  text "TWI_SCL" at -22.675,-79.975 h1.3
  text "PA10" at -69.803,-81.39 h0.67
  text "PD15" at -15.431,-81.39 h0.67
  text "UART_RX" at -29.8,-82.1 h1.3
  text "UART_TX" at -22.675,-82.1 h1.3
  text "PD27" at -8.242,-82.406 h0.67
  text "PD21" at -0.775,-82.406 h0.67
  text "PA22" at -69.803,-83.93 h0.67
  text "PD19" at -15.431,-83.93 h0.67
  text "SPI_SS_A" at -29.8,-84.225 h1.3
  text "SPI_MOSI" at -22.675,-84.225 h1.3
  text "PD20" at -8.242,-84.946 h0.67
  text "PD22" at -0.775,-84.946 h0.67
  text "SPI_MISO" at -29.8,-86.35 h1.3
  text "SPI_SCK" at -22.675,-86.35 h1.3
  text "PE05" at -69.803,-86.47 h0.67
  text "PD18" at -15.431,-86.47 h0.67
  text "GND" at -8.242,-87.486 h0.67
  text "3V3" at -0.775,-87.486 h0.67
  text "GND" at -29.8,-88.475 h1.3
  text "VCC" at -22.675,-88.475 h1.3
  text "PB13" at -69.803,-89.01 h0.67
  text "PD27" at -15.319,-89.01 h0.67
  text "PD00" at -69.803,-91.55 h0.67
  text "PD28" at -15.319,-91.55 h0.67
  text "PB03" at -69.803,-94.09 h0.67
  text "PB02" at -69.803,-96.63 h0.67
  text "GND" at -63.236,-96.829 h0.67 r270
  text "PC12" at -60.645,-96.829 h0.67 r270
  text "PA21" at -53.076,-96.829 h0.67 r270
  text "PA25" at -50.536,-96.829 h0.67 r270
  text "PB03" at -45.456,-96.829 h0.67 r270
  text "PD19" at -27.676,-96.829 h0.67 r270
  text "PB00" at -25.136,-96.829 h0.67 r270
  text "PA18" at -22.611,-96.829 h0.67 r270
  text "5V0" at -20.006,-96.829 h0.67 r270
  text "GND" at -63.186,-104.357 h0.67 r270
  text "5V0" at -20,-104.357 h0.67 r270
  text "PB01" at -22.546,-104.805 h0.67 r270
  text "PC14" at -60.6,-104.917 h0.67 r270
  text "PD18" at -27.625,-104.917 h0.67 r270
  text "PB04" at -52.775,-105.029 h0.67 r270
  text "PA24" at -50.345,-105.029 h0.67 r270
  text "PB02" at -42.85,-105.029 h0.67 r270
  text "c" at -13.523,-112.326 h4 r270
  text "p" at -13.507,-117.854 h4 r270
  text "A08-2216 Rev 4" at -5.387,-122.875 h2 r270
  text "Atmel Corp © 2016" at -8.776,-124.198 h2 r270
  text "t" at -13.503,-124.571 h4 r270
Board (M1):
  lines w0.1: -19.1,-0.353 -12.082,-0.353 ; -90,-135 -90,0 -54.209,0 ccw(c-53.434,0.686) -53.434,-0.35 -43.434,-0.35 ccw(c-43.434,0.686) -42.659,-0.001 -21.375,0 ccw(c-20.6,0.686) -20.6,-0.35 -10.6,-0.35 ccw(c-10.6,0.686) -9.825,-0.001 0,0 0,-135 -90,-135
TP Pos. (M5):
  circle w0.2: c-57.65,-2.35 r1.35
  circle w0.2: c-2.35,-2.35 r1.35
  circle w0.5: c-41.6,-1.5 r0.25
  circle w0.5: c-41.6,-3.5 r0.25
  circle w0.5: c-41.6,-5.5 r0.25
  circle w0.5: c-41.6,-7.5 r0.25
  circle w0.5: c-38.6,-1.5 r0.25
  circle w0.5: c-38.6,-3.5 r0.25
  circle w0.5: c-38.6,-5.5 r0.25
  circle w0.5: c-38.6,-7.5 r0.25
  circle w0.5: c-33,-1.5 r0.25
  circle w0.5: c-26,-1.5 r0.25
  lines w0.3: -48.15,-22.225 -41.65,-22.225 -41.65,-8.425 ; -48.15,-20.075 -43.6,-20.075 -43.6,-5.525 ; -48.15,-17.8 -44.625,-17.8 -44.625,-3.475 -42.325,-3.475 ; -48.15,-15.725 -45.525,-15.725 -45.525,-1.5 -42.325,-1.5 ; -43.054,-6.2 -42.354,-5.5 -43.054,-4.8 ; -43.025,-4.175 -42.325,-3.475 ; -43.025,-2.775 -42.325,-3.475 ; -43.025,-2.2 -42.325,-1.5 ; -43.025,-0.8 -42.325,-1.5 ; -42.35,-9.125 -41.65,-8.425 ; -42.3,-9.225 -41.6,-8.525 -40.9,-9.225 ; -40.95,-9.125 -41.65,-8.425 ; -39.3,-9.225 -38.6,-8.525 -37.9,-9.225 ; -39.25,-9.125 -38.55,-8.425 ; -37.85,-9.125 -38.55,-8.425 ; -37.175,-6.125 -37.875,-5.425 ; -37.175,-4.725 -37.875,-5.425 ; -37.175,-4.175 -37.875,-3.475 ; -37.175,-2.775 -37.875,-3.475 ; -37.175,-2.2 -37.875,-1.5 ; -37.175,-0.8 -37.875,-1.5 ; -33.675,-3.25 -32.975,-2.55 ; -32.975,-7.125 -32.975,-2.55 ; -32.275,-3.25 -32.975,-2.55 ; -32.05,-22.225 -38.55,-22.225 -38.55,-8.425 ; -32.05,-20.075 -36.6,-20.075 -36.6,-5.425 -37.875,-5.425 ; -32.05,-17.8 -35.575,-17.8 -35.575,-3.475 -37.875,-3.475 ; -32.05,-15.725 -34.675,-15.725 -34.675,-1.5 -37.875,-1.5 ; -26.7,-3.2 -26,-2.5 ; -26,-4.5 -26,-2.5 ; -25.3,-3.2 -26,-2.5
  text "Xplained Ultra MCU Test Points Placement" at -87.727,13.425 h5
  text "TP_TARGET_RESET" at -26.425,-6.075 h1
  text "TP_TARGET_BOOT" at -33.45,-8.7 h1
  text "TP_GND" at -54.427,-16.175 h1
  text "TP_EDBG_BOOT" at -31.25,-16.175 h1
  text "TP_EDBG_TCK" at -59.425,-18.383 h1
  text "TP_EDBG_RESET" at -31.25,-18.383 h1
  text "TP_EDBG_TDI" at -59.092,-20.592 h1
  text "TP_EDBG_TDO" at -31.25,-20.592 h1
  text "TP_EDBG_TMS" at -59.425,-22.8 h1
  text "TP_VCC_EDBG_P3V3" at -31.25,-22.8 h1
  text "TEST POINTS ON BOTTOM LAYER" at -52.725,-27.9 h1
Dimentions (M6):
  circle w0.254: c-87.65,-2.35 r1.35
  circle w0.254: c-2.35,-2.35 r1.35
  circle w0.254: c-2.35,-132.65 r1.35
  circle w0.254: c-87.65,-132.65 r1.35
  text "Xplained Ultra Mechanical Dimensions" at -83.192,13.452 h5
Conn. Doc. (M7):
  drawing of 551 lines, arcs and shapes, not listed
  text "Xplained Ultra MCU Connector Placement" at -86.86,13.425 h5
  text "TARGET USB" at -53.25,-6.95 h1
  text "DEBUG USB" at -19.95,-6.95 h1
  text "1" at -71.343,-8.2 h1
  text "MCU Power" at -35.625,-10.586 h1 r90
  text "2" at -77.765,-11.25 h1
  text "1" at -7.162,-12.05 h1
  text "1" at -7.162,-12.05 h1
  text "2" at -4.788,-12.05 h1
  text "2" at -4.788,-12.05 h1
  text "Power Jack" at -67.417,-12.722 h1 r90
  text "1" at -41.437,-13.888 h1
  text "2" at -39.063,-13.877 h1
  text "3" at -71.51,-14.2 h1
  text "SUPER CAP" at -66.842,-16.577 h1
  text "Camera Interface" at -83.775,-17.85 h1
  text "2" at -60.486,-18.947 h1
  text "19" at -48.856,-19.547 h1
  text "1" at -33.24,-19.54 h1
  text "Power Header" at -8.687,-20.508 h1 r90
  text "30" at -80.328,-20.594 h1
  text "29" at -73.642,-20.594 h1
  text "2" at -33.383,-21.21 h1
  text "20" at -49,-21.217 h1
  text "1" at -60.319,-21.487 h1
  text "10" at -17.586,-24.145 h1
  text "CORESIGHT 20 - SWD + ETM" at -52.075,-26.1 h1
  text "1" at -7.162,-27.29 h1
  text "2" at -4.788,-27.29 h1
  text "20" at -87.813,-30.927 h1
  text "19" at -85.19,-30.927 h1
  text "1" at -65.9,-33.289 h1
  text "USB VBUS" at -31.274,-34.48 h1
  text "3" at -25.418,-36.85 h1
  text "2" at -25.418,-39.39 h1
  text "VDDCORE" at -64.875,-41.15 h1
  text "1" at -25.251,-41.93 h1
  text "J500 Digital High" at -21.966,-42.994 h1 r90
  text "2" at -59.526,-43.46 h1
  text "1" at -59.359,-46 h1
  text "J501 Power" at -69.85,-46.552 h1 r90
  text "1" at -17.586,-47.005 h1
  text "Extension Header 1" at -8.687,-48.657 h1 r90
  text "Erase" at -29.775,-49.885 h1
  text "8" at -66.067,-51.069 h1
  text "8" at -17.586,-51.069 h1
  text "2" at -25.418,-52.255 h1
  text "SAMV71 Debug (SWD)" at -88.765,-52.721 h1 r90
  text "1" at -25.251,-54.795 h1
  text "2" at -79.328,-56.154 h1
  text "1" at -73.642,-56.154 h1
  text "1" at -65.9,-56.149 h1
  text "2" at -87.313,-58.442 h1
  text "1" at -84.607,-58.442 h1
  text "1" at -7.137,-62.85 h1
  text "2" at -4.763,-62.85 h1
  text "LCD Connector" at -88.786,-63.387 h1
  text "J506 SPI" at -46.448,-66.5 h1
  text "J503 Digital Low" at -21.966,-66.962 h1 r90
  text "1" at -84.8,-67.559 h1.5
  text "1" at -84.8,-67.559 h1.5
  text "1" at -17.586,-68.849 h1
  text "5" at -47.736,-68.987 h1
  text "1" at -37.952,-68.981 h1
  text "6" at -47.736,-71.527 h1
  text "2" at -38.119,-71.521 h1
  text "J502 Analog Low" at -70.017,-71.994 h1 r90
  text "10" at -84.8,-72.059 h1.5
  text "10" at -84.8,-72.059 h1.5
  text "MediaLB" at -81.249,-72.296 h1
  text "8" at -66.067,-73.929 h1
  text "8" at -17.586,-73.929 h1
  text "44" at -78.749,-74.377 h1.5
  text "40" at -81.6,-76.703 h1.5
  text "39" at -75.835,-76.699 h1.5
  text "20" at -84.8,-77.059 h1.5
  text "20" at -84.8,-77.059 h1.5
  text "1" at -65.9,-79.009 h1
  text "43" at -76.803,-81.51 h1.5 r90
  text "30" at -84.801,-82.059 h1.5
  text "30" at -84.801,-82.059 h1.5
  text "Extension Header 2" at -8.662,-84.217 h1 r90
  text "40" at -84.8,-87.059 h1.5
  text "40" at -84.8,-87.059 h1.5
  text "42" at -76.803,-87.861 h1.5 r90
  text "J505 Communication" at -21.8,-90.905 h1 r90
  text "1" at -17.586,-91.709 h1
  text "50" at -84.8,-92.059 h1.5
  text "50" at -84.8,-92.059 h1.5
  text "2" at -81.161,-92.546 h1.5
  text "1" at -75.388,-92.538 h1.5
  text "J504 Analog High" at -70.017,-93.508 h1 r90
  text "41" at -78.76,-94.377 h1.5
  text "J507 Digital Extra" at -50.199,-96.168 h1
  text "8" at -66.067,-96.789 h1
  text "35" at -66.858,-99.334 h1
  text "1" at -17.224,-99.334 h1
  text "36" at -66.858,-101.874 h1
  text "2" at -17.439,-101.874 h1
  text "12" at -23.435,-105.975 h1
  text "1" at -9.625,-105.975 h1
  text "10" at -58.184,-107.299 h1
  text "8" at -55.768,-107.299 h1
  text "7" at -54.068,-107.299 h1
  text "6" at -51.638,-107.299 h1
  text "5" at -49.138,-107.299 h1
  text "4" at -46.638,-107.299 h1
  text "3" at -44.138,-107.299 h1
  text "2" at -41.643,-107.299 h1
  text "1" at -38.977,-107.299 h1
  text "9" at -36.638,-107.299 h1
  text "13" at -58.225,-109.2 h1
  text "16" at -33.475,-109.2 h1
  text "11" at -58.225,-116.15 h1
  text "2" at -68.259,-117.588 h1
  text "2" at -80.759,-117.638 h1
  text "SDCARD Socket" at -51.215,-119.197 h1
  text "Ethernet - RJ45" at -23.239,-120.526 h1
  text "(bottom side)" at -50.881,-121.197 h1
  text "14" at -58.225,-122.2 h1
  text "15" at -33.513,-122.2 h1
  text "3" at -70.36,-122.524 h1
  text "1" at -65.825,-122.524 h1
  text "3" at -82.86,-122.574 h1
  text "1" at -78.325,-122.574 h1
  text "12" at -58.225,-126.198 h1
  text "14" at -26.244,-126.258 h1
  text "13" at -7.404,-126.258 h1
  text "CAN" at -61.57,-128.274 h1
  text "5" at -71.144,-129.274 h1
  text "4" at -65.398,-129.274 h1
  text "5" at -83.644,-129.324 h1
  text "4" at -77.898,-129.324 h1
  text "Headphone" at -80.092,-129.682 h1 r90
  text "Microphone" at -67.592,-130.098 h1 r90
  text "2" at -58.155,-130.905 h1
  text "1" at -57.989,-133.445 h1
Reserved (M8):
  circle w0.254: c-39.99,-71.021 r0.5
  circle w0.254: c-42.53,-71.021 r0.5
  circle w0.254: c-45.07,-71.021 r0.5
  circle w0.254: c-39.995,-68.481 r0.5
  circle w0.254: c-42.535,-68.481 r0.5
  circle w0.254: c-45.075,-68.481 r0.5
  circle w0.254: c-27.295,-101.374 r0.5
  circle w0.254: c-29.835,-101.374 r0.5
  circle w0.254: c-32.375,-101.374 r0.5
  circle w0.254: c-34.915,-101.374 r0.5
  circle w0.254: c-37.455,-101.374 r0.5
  circle w0.254: c-24.755,-101.374 r0.5
  circle w0.254: c-22.215,-101.374 r0.5
  circle w0.254: c-19.675,-101.374 r0.5
  circle w0.254: c-27.295,-98.834 r0.5
  circle w0.254: c-29.835,-98.834 r0.5
  circle w0.254: c-32.375,-98.834 r0.5
  circle w0.254: c-34.915,-98.834 r0.5
  circle w0.254: c-37.455,-98.834 r0.5
  circle w0.254: c-24.755,-98.834 r0.5
  circle w0.254: c-22.215,-98.834 r0.5
  circle w0.254: c-19.675,-98.834 r0.5
  circle w0.254: c-52.695,-101.374 r0.5
  circle w0.254: c-55.235,-101.374 r0.5
  circle w0.254: c-57.775,-101.374 r0.5
  circle w0.254: c-60.315,-101.374 r0.5
  circle w0.254: c-62.855,-101.374 r0.5
  circle w0.254: c-50.155,-101.374 r0.5
  circle w0.254: c-47.615,-101.374 r0.5
  circle w0.254: c-45.075,-101.374 r0.5
  circle w0.254: c-42.535,-101.374 r0.5
  circle w0.254: c-39.995,-101.374 r0.5
  circle w0.254: c-52.695,-98.834 r0.5
  circle w0.254: c-55.235,-98.834 r0.5
  circle w0.254: c-57.775,-98.834 r0.5
  circle w0.254: c-60.315,-98.834 r0.5
  circle w0.254: c-62.855,-98.834 r0.5
  circle w0.254: c-50.155,-98.834 r0.5
  circle w0.254: c-47.615,-98.834 r0.5
  circle w0.254: c-45.075,-98.834 r0.5
  circle w0.254: c-42.535,-98.834 r0.5
  circle w0.254: c-39.995,-98.834 r0.5
  circle w0.254: c-67.93,-93.749 r0.5
  circle w0.254: c-67.93,-91.209 r0.5
  circle w0.254: c-67.93,-88.669 r0.5
  circle w0.254: c-67.93,-86.129 r0.5
  circle w0.254: c-67.93,-83.589 r0.5
  circle w0.254: c-67.93,-96.289 r0.5
  circle w0.254: c-67.93,-68.349 r0.5
  circle w0.254: c-67.93,-65.809 r0.5
  circle w0.254: c-67.93,-63.269 r0.5
  circle w0.254: c-67.93,-60.729 r0.5
  circle w0.254: c-67.93,-58.189 r0.5
  circle w0.254: c-67.93,-70.889 r0.5
  circle w0.254: c-67.93,-73.429 r0.5
  circle w0.254: c-67.93,-78.509 r0.5
  circle w0.254: c-67.93,-81.049 r0.5
  circle w0.254: c-67.93,-42.949 r0.5
  circle w0.254: c-67.93,-40.409 r0.5
  circle w0.254: c-67.93,-37.869 r0.5
  circle w0.254: c-67.93,-35.329 r0.5
  circle w0.254: c-67.93,-32.789 r0.5
  circle w0.254: c-67.93,-45.489 r0.5
  circle w0.254: c-67.93,-48.029 r0.5
  circle w0.254: c-67.93,-50.569 r0.5
  circle w0.254: c-67.93,-55.649 r0.5
  circle w0.254: c-19.67,-83.589 r0.5
  circle w0.254: c-19.67,-81.049 r0.5
  circle w0.254: c-19.67,-78.509 r0.5
  circle w0.254: c-19.67,-75.969 r0.5
  circle w0.254: c-19.67,-73.429 r0.5
  circle w0.254: c-19.67,-86.129 r0.5
  circle w0.254: c-19.67,-88.669 r0.5
  circle w0.254: c-19.67,-91.209 r0.5
  circle w0.254: c-19.67,-60.729 r0.5
  circle w0.254: c-19.67,-58.189 r0.5
  circle w0.254: c-19.67,-55.649 r0.5
  circle w0.254: c-19.67,-53.109 r0.5
  circle w0.254: c-19.67,-50.569 r0.5
  circle w0.254: c-19.67,-63.269 r0.5
  circle w0.254: c-19.67,-65.809 r0.5
  circle w0.254: c-19.67,-68.349 r0.5
  circle w0.254: c-19.67,-46.505 r0.5
  circle w0.254: c-19.67,-43.965 r0.5
  circle w0.254: c-19.67,-41.425 r0.5
  circle w0.254: c-19.67,-38.885 r0.5
  circle w0.254: c-19.67,-36.345 r0.5
  circle w0.254: c-19.67,-23.645 r0.5
  circle w0.254: c-19.67,-26.185 r0.5
  circle w0.254: c-19.67,-28.725 r0.5
  circle w0.254: c-19.67,-31.265 r0.5
  circle w0.254: c-19.67,-33.805 r0.5
  text "Xplained Ultra MCU Arduino Connector Placement" at -95.189,13.425 h5
  text "1" at -21.528,-24.145 h1
  text "1" at -65.725,-33.289 h1
  text "10" at -18.2,-47.005 h1
  text "Offset, not 100 mil" at -54.1,-49.3 h1.52
  text "1" at -21.528,-50.1 h1
  text "8" at -65.725,-51.069 h1
  text "1" at -65.725,-56.149 h1
  text "8" at -21.695,-68.849 h1
  text "8" at -65.725,-73.929 h1
  text "1" at -21.528,-73.929 h1
  text "1" at -65.725,-79.009 h1
  text "100-mil pitch" at -50.5,-80.9 h1.52
  text "8" at -21.695,-91.709 h1
  text "8" at -65.725,-96.789 h1
  text "35" at -63.688,-97.6 h1
  text "1" at -17.728,-99.334 h1
  text "36" at -66.1,-101.874 h1
  text "2" at -17.895,-101.874 h1
Test Jig (M9):
  circle w0.5: c-64.401,44 r1.25
  circle w0.5: c-0.401,44 r1.25
  circle w0.5: c-31.651,44 r1.25
  circle w0.5: c-2.35,-132.65 r1.5
  circle w0.5: c-2.35,-2.35 r1.5
  circle w0.5: c-87.651,-132.65 r1.5
  circle w0.5: c-87.651,-2.35 r1.5
  lines w0.5: -85.151,-128.65 cw(c-85.151,-130.15) -83.651,-130.15 ; -85.001,-128.65 -87.501,-128.65 cw(c-87.501,-127.15) -89.001,-127.15 -89.001,-7.85 cw(c-87.501,-7.85) -87.501,-6.35 -85.151,-6.35 ccw(c-85.151,-4.85) -83.651,-4.85 -83.651,-2 cw(c-82.151,-2) -82.151,-0.5 -7.851,-0.5 cw(c-7.851,-2) -6.351,-2 -6.351,-4.85 ccw(c-4.851,-4.85) -4.851,-6.35 -2.501,-6.35 cw(c-2.501,-7.85) -1.001,-7.85 -1.001,-127.15 cw(c-2.501,-127.15) -2.501,-128.65 -4.851,-128.65 ccw(c-4.851,-130.15) -6.351,-130.15 -6.351,-132.5 cw(c-7.851,-132.5) -7.851,-134 -82.151,-134 cw(c-82.151,-132.5) -83.651,-132.5 -83.651,-130 ; -135.001,-147.5 -132.001,-150.5 41.999,-150.5 44.999,-147.5 44.999,46.5 41.999,49.5 -132.001,49.5 -135.001,46.5 -135.001,-147.5 ; -71.151,3.5 cw(c-71.151,5) -71.151,6.5 -71.151,35.5 cw(c-71.151,37) -71.151,38.5 6.349,38.5 cw(c6.349,37) 6.349,35.5 6.349,6.5 cw(c6.349,5) 6.349,3.5 -71.151,3.5
  text "Xplained Ultra FCT" at 28.949,-90.419 h10 r90
  text "Mechanical 9 layer contains the outline for the Xplained Ultra MCU test-jig." at -132.124,-153.82 h3